# Altium PCB X-DO10 RFID_V1.0..PcbDoc (part 3 of 3)
Units mm, origin at the board's own origin, x right, y up, seen from the top; angles counter-clockwise.
Board outline 1582.55 x 1344.17 mm, 2 copper layers (Top Layer, Bottom Layer); 182 components, 148 nets, 511 pads, 172 vias.
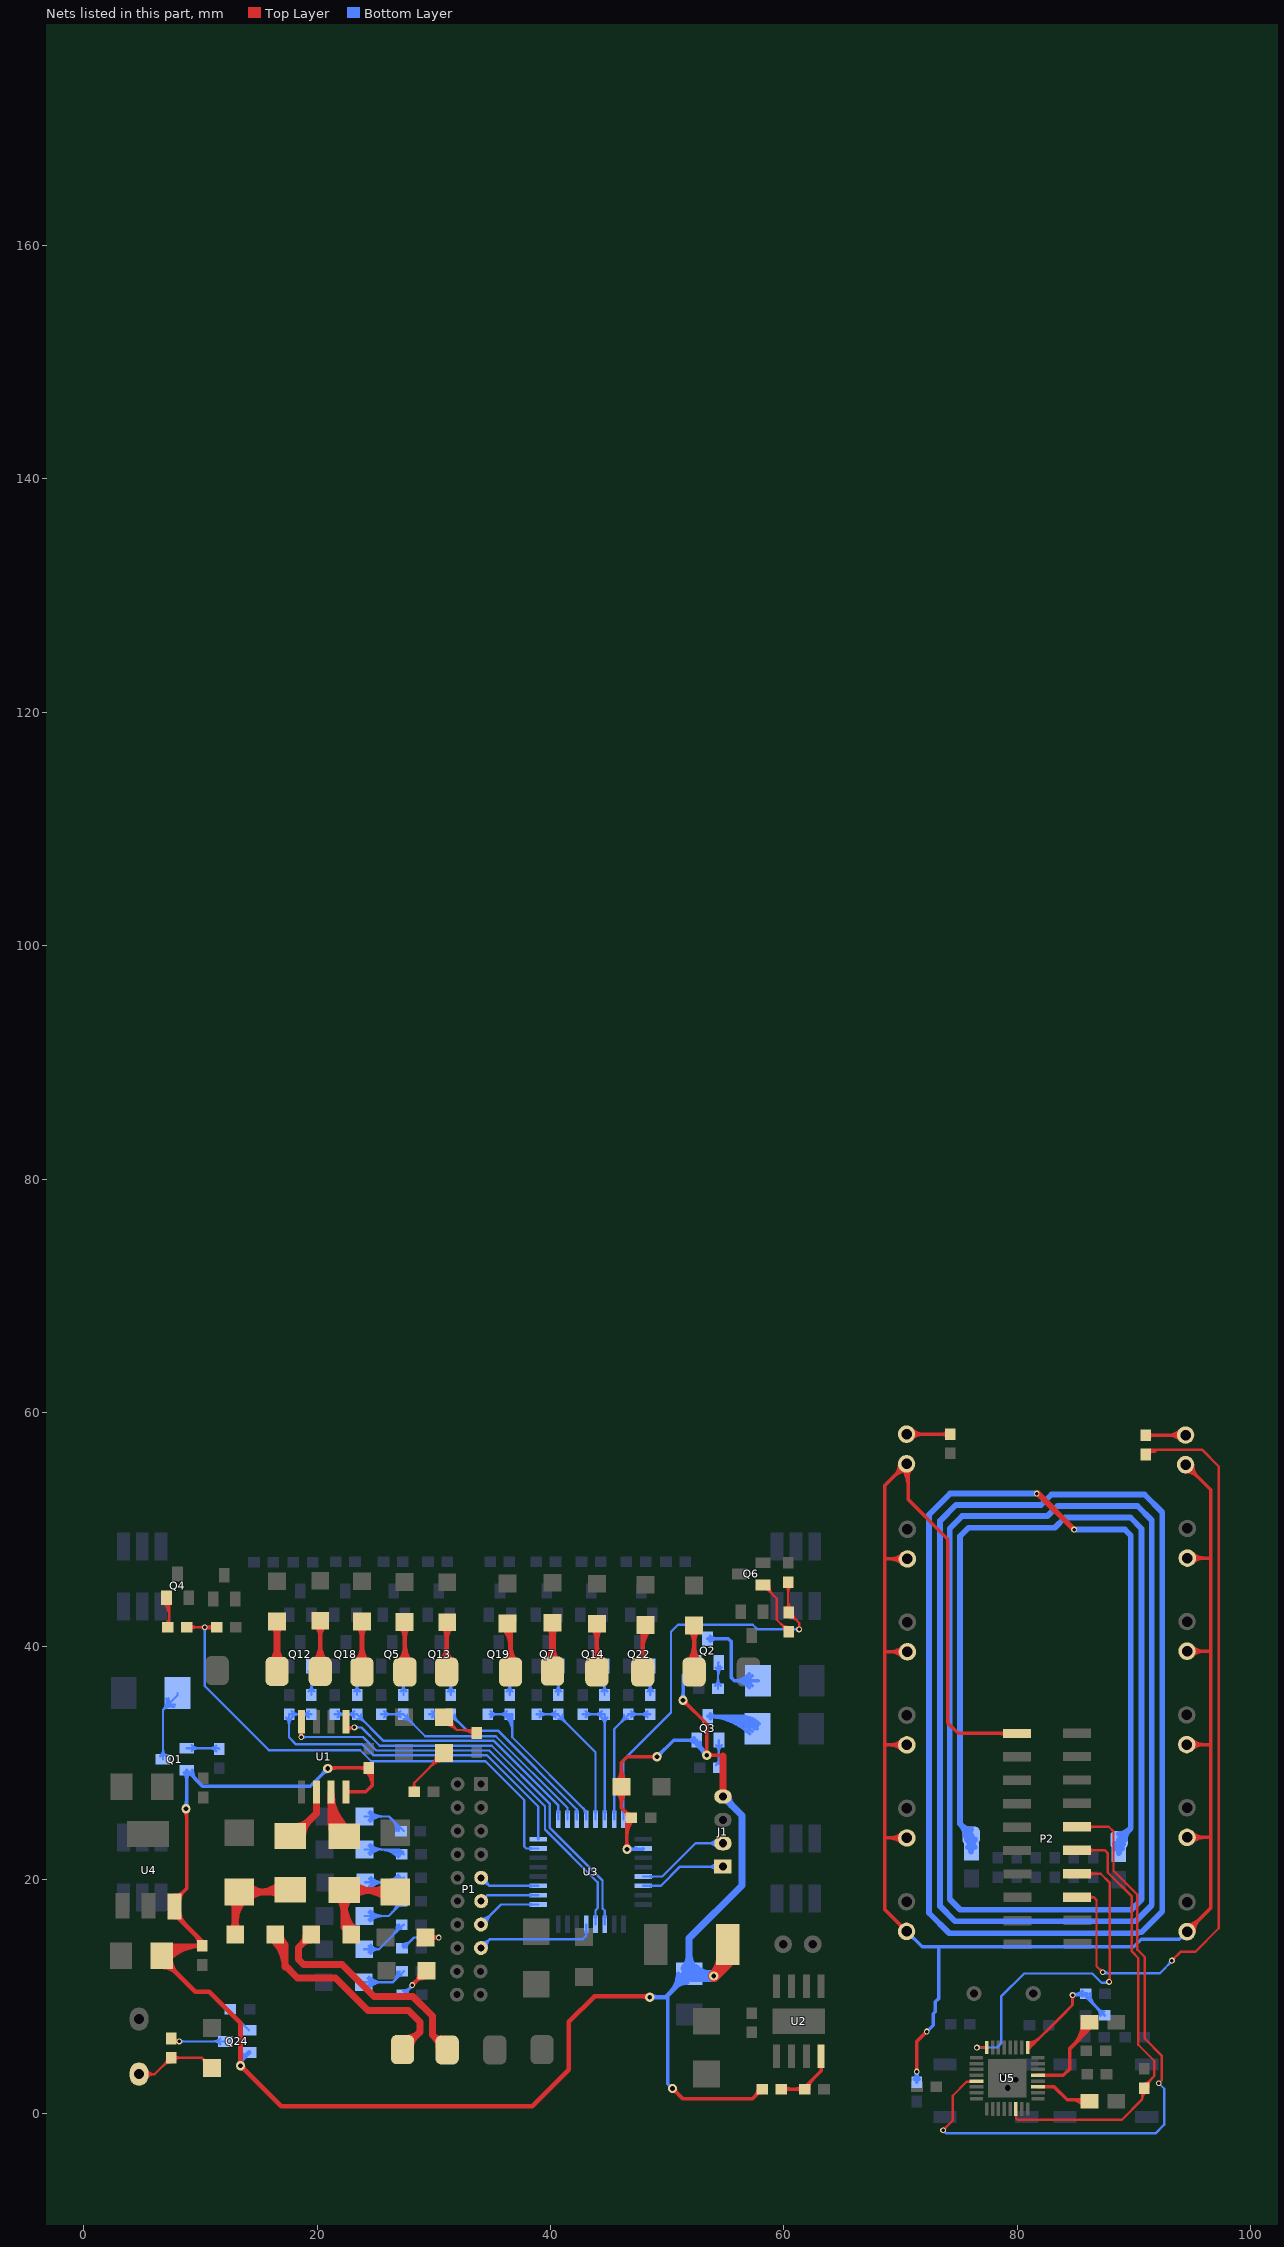
[diagram p3: the nets of this part, all layers, seen from the top]

## Via types
v1: diameter 0.5, hole 0.3, Top Layer to Bottom Layer, 158 vias
v2: diameter 0.8, hole 0.4, Top Layer to Bottom Layer, 14 vias

## Nets (pads, with @x,y where several pads share a name; then routed paths per layer and width w, separated by ;. In a path a pad name is that pad's centre, name@x,y a point inside that pad or via, vN(x,y) a via of type N, cw(c..) or ccw(c..) an arc to the next point about the centre after c; other vN are vias at no path point) (continued)
NetD7_1: D7.1 R12.1 | length 10.1
  Bottom Layer w0.2: D7.1@24.075,25.425 26.175,25.425 R12.1@27.425,24.175 ; D7.1@24.402,25.098 cw(c25.19,24.31) 25.19,25.425 cw(c25.19,26.54) D7.1@24.402,25.752 ; D7.1@24.543,24.957 cw(c25.673,23.827) 25.673,25.425 cw(c25.673,27.023) D7.1@24.543,25.893 ; 26.358,25.242 cw(c25.291,24.175) R12.1@26.8,24.175 ; 26.699,24.9 cw(c25.974,24.175) R12.1@27,24.175
NetD8_1: D8.1 R13.1 | length 12.7
  Bottom Layer w0.2: D8.1@24.075,22.6 26.996,22.6 R13.1@27.425,22.171 ; D8.1@24.402,22.273 cw(c25.19,21.485) 25.19,22.6 cw(c25.19,23.715) D8.1@24.402,22.927 ; D8.1@24.543,22.132 cw(c25.673,21.002) 25.673,22.6 cw(c25.673,24.198) D8.1@24.543,23.068 ; 25.329,22.6 cw(c25.329,20.304) R13.1@26.953,21.928 ; 25.812,22.6 cw(c25.812,20.787) R13.1@27.094,22.069 ; 26.295,22.6 cw(c26.295,21.27) R13.1@27.235,22.21 ; R13.1@26.778,22.6 cw(c26.778,21.753) R13.1@27.377,22.352
NetD9_1: D9.1 R14.1 | length 12.4
  Bottom Layer w0.2: D9.1@24.125,19.775 27.032,19.775 R14.1@27.425,20.168 ; D9.1@24.452,19.448 cw(c25.24,18.66) 25.24,19.775 cw(c25.24,20.89) D9.1@24.452,20.102 ; D9.1@24.593,19.307 cw(c25.723,18.177) 25.723,19.775 cw(c25.723,21.373) D9.1@24.593,20.243 ; 25.389,19.775 ccw(c25.389,21.986) R14.1@26.953,20.422 ; 25.872,19.775 ccw(c25.872,21.503) R14.1@27.094,20.281 ; 26.355,19.775 ccw(c26.355,21.02) R14.1@27.235,20.14 ; R14.1@26.838,19.775 ccw(c26.838,20.537) R14.1@27.377,19.998
NetD10_1: D10.1 R27.1 | length 10.6
  Top Layer w0.2: D10.1@29.3,15.05 v1(30.425,15.05) ; D10.1@29.704,14.826 cw(c30.085,14.614) 30.085,15.05 cw(c30.085,15.486) D10.1@29.704,15.274 ; D10.1@29.879,14.729 cw(c30.425,14.425) v1(30.425,15.05) ; D10.1@29.879,15.371 ccw(c30.425,15.675) v1(30.425,15.05) ; v1@30.289,14.986 ccw(c30.042,14.869) 30.113,15.134 ccw(c30.183,15.398) v1@30.339,15.173 ; v1@30.289,15.114 cw(c30.042,15.231) 30.113,14.966 cw(c30.183,14.702) v1@30.339,14.927 ; v1@30.319,14.944 ccw(c30.063,14.688) 30.063,15.05 ccw(c30.063,15.412) v1@30.319,15.156
  Bottom Layer w0.2: R27.1@27.325,14.3 ccw(c27.325,14.886) R27.1@27.74,14.472 ; R27.1@27.325,14.5 ccw(c27.325,15.569) 28.081,14.813 ; R27.1@27.425,14.157 28.318,15.05 v1(30.425,15.05) ; R27.1@27.675,14.15 cw(c28.296,14.15) 27.857,14.589 ; v1@30.319,14.944 ccw(c30.063,14.688) 30.063,15.05 ccw(c30.063,15.412) v1@30.319,15.156
NetD11_1: D11.1 R28.1 | length 10.1
  Bottom Layer w0.2: D11.1@24.075,16.9 26.136,16.9 R28.1@27.4,18.164 ; D11.1@24.402,16.573 cw(c25.19,15.785) 25.19,16.9 cw(c25.19,18.015) D11.1@24.402,17.227 ; D11.1@24.543,16.432 cw(c25.673,15.302) 25.673,16.9 cw(c25.673,18.498) D11.1@24.543,17.368 ; 26.454,17.218 ccw(c25.496,18.175) R28.1@26.85,18.175 ; 26.795,17.559 ccw(c26.179,18.175) R28.1@27.05,18.175 ; R28.1@26.962,17.727 cw(c27.2,17.489) R28.1@27.2,17.825
NetD12_1: D12.1 R29.1 | length 9.1
  Bottom Layer w0.2: D12.1@24.05,14.05 25.314,14.05 ; D12.1@24.43,13.787 cw(c24.932,13.439) 24.932,14.05 cw(c24.932,14.661) D12.1@24.43,14.313 ; D12.1@24.594,13.673 cw(c25.314,13.174) 25.314,14.05 ; D12.1@24.594,14.427 ccw(c25.314,14.926) 25.314,14.05 ; 26.451,15.187 ccw(c25.488,16.15) R29.1@26.85,16.15 ; 26.792,15.528 ccw(c26.171,16.15) R29.1@27.05,16.15 ; R29.1@26.968,15.704 cw(c27.2,15.472) R29.1@27.2,15.8 ; R29.1@27.425,16.161 25.314,14.05
NetD13_1: D13.1 R39.1 | length 10
  Bottom Layer w0.2: D13.1@24,11.225 26.496,11.225 ; D13.1@24.327,10.898 cw(c25.115,10.11) 25.115,11.225 cw(c25.115,12.34) D13.1@24.327,11.552 ; D13.1@24.468,10.757 cw(c25.598,9.627) 25.598,11.225 cw(c25.598,12.823) D13.1@24.468,11.693 ; 26.835,11.563 ccw(c26.254,12.143) R39.1@27.075,12.149 ; R39.1@26.875,12.148 cw(c25.583,12.139) 26.496,11.225 ; 26.963,11.691 cw(c27.225,11.429) R39.1@27.225,11.8 ; R39.1@27.425,12.154 26.496,11.225
NetD14_1: D14.1 R40.1 | length 11.1
  Top Layer w0.2: v1@28.112,11.12 ccw(c27.992,11.582) 28.404,11.341 ; v1(28.15,10.975) D14.1@29.375,12.2 ; v1@28.15,11.125 ccw(c28.15,11.487) 28.406,11.231 ccw(c28.662,10.975) v1@28.3,10.975 ; v1@28.188,11.12 ccw(c28.25,11.359) 28.375,11.146 ; v1@28.295,10.937 cw(c28.757,10.817) 28.516,11.229 ; v1@28.295,11.013 cw(c28.534,11.075) 28.321,11.2 ; D14.1@28.713,12.2 cw(c27.115,12.2) 28.245,11.07 cw(c29.375,9.94) D14.1@29.375,11.538 ; D14.1@28.913,12.2 cw(c27.798,12.2) 28.586,11.411 cw(c29.375,10.623) D14.1@29.375,11.738
  Bottom Layer w0.2: R40.1@27.375,10.5 ccw(c27.375,11.224) 27.887,10.712 ; R40.1@27.425,10.15 27.425,10.25 v1(28.15,10.975) ; R40.1@27.725,10.15 cw(c28.691,10.15) v1@28.008,10.833 ; 27.861,10.579 cw(c28.329,10.309) v1@28.189,10.83 ; v1@28,10.975 cw(c27.638,10.975) 27.894,10.719 cw(c28.15,10.463) v1@28.15,10.825
NetD15_1: D15.1 R41.1 | length 9.4
  Top Layer w0.2: D15.1@30.875,33.925 31.975,32.825 ; D15.1@30.884,33.463 cw(c30.904,32.419) 31.643,33.157 cw(c32.381,33.896) D15.1@31.337,33.916 ; D15.1@30.888,33.263 cw(c30.917,31.767) 31.975,32.825 ; D15.1@31.537,33.912 ccw(c33.033,33.883) 31.975,32.825 ; 32.372,32.825 cw(c32.372,31.297) R41.1@33.453,32.378 ; 32.855,32.825 cw(c32.855,31.78) R41.1@33.594,32.519 ; R41.1@33.7,32.825 31.975,32.825
NetD16_1: D16.1 R48.1 | length 9.7
  Top Layer w0.2: R48.1@28.1,27.818 ccw(c27.697,28.3) 28.325,28.3 ; R48.1@28.325,27.55 28.325,28.3 ; R48.1@28.55,27.818 cw(c28.953,28.3) 28.325,28.3 ; D16.1@30.213,30.85 cw(c28.615,30.85) 29.745,29.72 cw(c30.875,28.59) D16.1@30.875,30.188 ; D16.1@30.413,30.85 cw(c29.298,30.85) 30.086,30.061 cw(c30.875,29.273) D16.1@30.875,30.388 ; D16.1@30.875,30.85 28.325,28.3
NetD25_2: D25.2 R55.2 | length 7.1
  Top Layer w0.3: D25.2@70.5,58.17 R55.2@74.22,58.17 ; D25.2@70.924,57.746 cw(c71.949,56.721) 71.949,58.17 cw(c71.949,59.619) D25.2@70.924,58.594 ; 73.489,58.17 ccw(c73.489,58.911) R55.2@74.013,58.387 ; 73.513,58.17 cw(c73.513,57.463) R55.2@74.013,57.963
NetD28_2: D28.2 R58.2 | length 7.4
  Top Layer w0.3: R58.2@90.975,58.075 D28.2@94.38,58.075 ; R58.2@91.187,57.863 cw(c91.699,57.351) 91.699,58.075 cw(c91.699,58.799) R58.2@91.187,58.287 ; 92.903,58.075 ccw(c92.903,59.592) D28.2@93.976,58.519 ; 93,58.075 cw(c93,56.695) D28.2@93.976,57.671 ; 93.627,58.075 ccw(c93.627,58.868) D28.2@94.188,58.307
NetD29_2: D29.2 LS1.2 R56.1 | length 15.7
  Top Layer w0.2: LS1.2@4.75,3.35 6.1,3.35 ; LS1.2@5.159,3.062 cw(c5.714,2.67) 5.714,3.35 cw(c5.714,4.029) LS1.2@5.159,3.638 ; LS1.2@5.322,2.946 cw(c6.1,2.399) 6.1,3.35 ; LS1.2@5.322,3.753 ccw(c6.1,4.301) 6.1,3.35 ; 6.817,4.067 cw(c7.5,3.384) R56.1@7.5,4.35 ; 6.938,4.188 ccw(c6.426,4.7) R56.1@7.15,4.7 ; R56.1@7.747,4.503 cw(c8.345,3.905) 8.345,4.75 cw(c8.345,5.595) R56.1@7.747,4.997 ; D29.2@10.35,3.998 ccw(c9.53,4.159) 10.121,4.75 ; D29.2@10.547,3.96 ccw(c9.974,4.072) 10.387,4.484 ccw(c10.799,4.897) D29.2@10.911,4.324 ; D29.2@10.873,4.521 cw(c10.712,5.341) 10.121,4.75 ; D29.2@11,3.871 10.121,4.75 ; 6.1,3.35 R56.1@7.5,4.75 10.121,4.75
NetDO1_1: DO1.1 F3.2 | length 8.7
  Top Layer w0.6: DO1.1@16.08,38.595 ccw(c14.885,39.79) 16.575,39.79 ccw(c18.265,39.79) DO1.1@17.07,38.595 ; F3.2@16.248,41.809 cw(c15.46,41.02) 16.575,41.02 cw(c17.69,41.02) F3.2@16.902,41.809 ; DO1.1@16.575,37.85 F3.2@16.575,42.136
NetDO2_1: DO2.1 F4.2 | length 9.5
  Top Layer w0.4: DO2.1@19.709,38.666 ccw(c18.344,40.031) 20.275,40.031 ccw(c22.206,40.031) DO2.1@20.841,38.666 ; F4.2@19.878,41.788 cw(c18.918,40.829) 20.275,40.829 cw(c21.632,40.829) F4.2@20.672,41.788 ; DO2.1@20.275,37.85 F4.2@20.275,42.186
NetDO3_1: DO3.1 F5.2 | length 9.5
  Top Layer w0.4: DO3.1@23.284,38.616 ccw(c21.919,39.981) 23.85,39.981 ccw(c25.781,39.981) DO3.1@24.416,38.616 ; F5.2@23.453,41.738 cw(c22.493,40.779) 23.85,40.779 cw(c25.207,40.779) F5.2@24.247,41.738 ; DO3.1@23.85,37.8 F5.2@23.85,42.136
NetDO4_1: DO4.1 F6.2 | length 9.5
  Top Layer w0.4: DO4.1@26.959,38.616 ccw(c25.594,39.981) 27.525,39.981 ccw(c29.456,39.981) DO4.1@28.091,38.616 ; F6.2@27.103,41.688 cw(c26.083,40.668) 27.525,40.668 ; F6.2@27.5,42.086 27.525,42.061 DO4.1@27.525,37.8 ; 27.525,40.789 cw(c28.796,40.789) F6.2@27.897,41.688
NetDO5_1: DO5.1 F7.2 | length 9.5
  Top Layer w0.4: DO5.1@30.534,38.616 ccw(c29.169,39.981) 31.1,39.981 ccw(c33.031,39.981) DO5.1@31.666,38.616 ; F7.2@30.753,41.663 cw(c29.914,40.824) 31.1,40.824 ; DO5.1@31.1,37.8 31.1,41.81 F7.2@31.35,42.061 ; 31.1,40.583 cw(c32.628,40.583) F7.2@31.547,41.663
NetDO6_1: DO6.1 F8.2 | length 10.4
  Top Layer w0.4: F8.2@35.928,41.563 cw(c34.365,40) 36.575,40 ; DO6.1@36.009,38.616 ccw(c34.644,39.981) 36.575,39.981 ccw(c38.506,39.981) DO6.1@37.141,38.616 ; F8.2@36.21,41.846 cw(c35.33,40.966) 36.575,40.966 ; F8.2@36.325,41.961 36.575,41.711 DO6.1@36.575,37.8 ; F8.2@36.575,41.207 cw(c37.078,41.207) F8.2@36.722,41.563
NetDO7_1: DO7.1 F9.2 | length 8.5
  Top Layer w0.6: DO7.1@39.68,38.62 ccw(c38.485,39.815) 40.175,39.815 ccw(c41.865,39.815) DO7.1@40.67,38.62 ; F9.2@39.848,41.684 cw(c39.06,40.895) 40.175,40.895 cw(c41.29,40.895) F9.2@40.502,41.684 ; DO7.1@40.175,37.875 F9.2@40.175,42.011
NetDO8_1: DO8.1 F10.2 | length 9.3
  Top Layer w0.4: DO8.1@43.409,38.616 ccw(c42.044,39.981) 43.975,39.981 ccw(c45.906,39.981) DO8.1@44.541,38.616 ; F10.2@43.578,41.538 cw(c42.618,40.579) 43.975,40.579 cw(c45.332,40.579) F10.2@44.372,41.538 ; DO8.1@43.975,37.8 F10.2@43.975,41.936
NetDO9_1: DO9.1 F11.2 | length 10.1
  Top Layer w0.4: DO9.1@47.334,38.616 ccw(c45.969,39.981) 47.9,39.981 ccw(c49.831,39.981) DO9.1@48.466,38.616 ; F11.2@47.728,41.438 cw(c47.311,41.022) 47.9,41.022 ; DO9.1@47.9,37.8 F11.2@47.9,41.836 ; 47.9,39.936 cw(c50.025,39.936) F11.2@48.522,41.438 ; 47.9,40.901 cw(c49.059,40.901) F11.2@48.24,41.721
NetDO10_1: DO10.1 F12.2 | length 9.2
  Top Layer w0.4: DO10.1@51.734,38.616 ccw(c50.369,39.981) 52.3,39.981 ccw(c54.231,39.981) DO10.1@52.866,38.616 ; F12.2@51.903,41.388 cw(c50.943,40.429) 52.3,40.429 cw(c53.657,40.429) F12.2@52.697,41.388 ; DO10.1@52.3,37.8 F12.2@52.3,41.786
NetF1_1: F1.1 R6.1 T2.2 | length 19.3
  Top Layer w0.6: T2.2@12.627,18.349 cw(c11.761,17.483) 12.986,17.483 ; F1.1@12.659,15.627 ccw(c11.87,16.415) 12.986,16.415 ccw(c14.101,16.415) F1.1@13.312,15.627 ; T2.2@12.875,18.945 16.82,18.945 R6.1@17.025,19.15 ; F1.1@12.986,15.3 T2.2@12.986,18.085 ; 12.986,16.336 cw(c15.832,16.336) T2.2@13.819,18.349 ; 12.986,17.785 cw(c14.383,17.785) T2.2@13.395,18.773 ; T2.2@14.073,18.349 cw(c15.512,16.91) 15.512,18.945 cw(c15.512,20.98) T2.2@14.073,19.541 ; 15.049,18.945 ccw(c15.049,21.576) R6.1@16.909,19.716 ; 16.039,18.945 cw(c16.039,17.714) R6.1@16.909,18.584
NetF1_2: F1.2 M485A.1 | length 28.3
  Top Layer w0.6: F1.2@16.12,14.944 cw(c14.139,12.545) 17.25,12.545 ; F1.2@16.415,14.838 cw(c16.415,13.723) 17.203,14.511 cw(c17.992,15.3) F1.2@16.877,15.3 ; F1.2@16.415,15.3 17.25,14.464 17.25,12.675 18.325,11.6 21.575,11.6 24.375,8.8 27.825,8.8 28.825,7.8 28.825,6.95 ; F1.2@16.502,15.406 cw(c15.191,13.819) 17.25,13.819 ; M485A.1@27.325,5.45 28.825,6.95 ; M485A.1@27.368,6.399 ccw(c27.485,8.29) 28.825,6.95 ; M485A.1@28.025,5.7 cw(c29.111,5.7) 28.343,6.468
NetF2_1: F2.1 R5.1 T1.2 | length 21.6
  Top Layer w0.6: R5.1@21.759,18.559 cw(c20.394,17.194) 22.325,17.194 cw(c24.256,17.194) R5.1@22.891,18.559 ; 22.325,16.45 ccw(c24.09,16.45) F2.1@22.842,15.202 ; 22.325,17.899 ccw(c25.538,17.899) F2.1@23.266,15.627 ; F2.1@22.939,15.3 22.325,15.914 22.325,19.075 26.57,19.075 T1.2@26.7,18.945 ; R5.1@23.141,18.559 cw(c24.386,17.314) 24.386,19.075 ; R5.1@23.141,19.691 ccw(c24.627,21.177) 24.627,19.075 ; 24.224,19.075 cw(c24.224,16.596) T1.2@25.977,18.349 ; 24.852,19.075 ccw(c24.852,20.666) T1.2@25.977,19.541
NetF2_2: F2.2 M485B.1 | length 23.3
  Top Layer w0.6: F2.2@19.048,15.3 cw(c17.933,15.3) 18.722,14.511 cw(c19.51,13.723) F2.2@19.51,14.838 ; F2.2@19.51,15.3 18.4,14.189 18.4,13.175 18.825,12.75 22.125,12.75 24.875,10 28.2,10 29.875,8.325 29.875,6.7 M485B.1@31.15,5.425 ; 29.875,6.7 ccw(c30.757,7.581) M485B.1@31.009,6.361 ; 30.132,6.443 cw(c29.364,5.675) M485B.1@30.45,5.675
NetL2_1: L2.1 U5.11 | length 7.1
  Top Layer w0.3: U5.11@81.75,2.25 83.15,2.25 84.25,1.15 L2.1@85.907,1.15 ; 84.582,1.15 cw(c84.582,-0.448) L2.1@85.712,0.682 ; 85.186,1.15 ccw(c85.186,1.894) L2.1@85.712,1.368 ; 85.307,1.15 cw(c85.307,0.277) L2.1@85.924,0.894
NetL3_1: L3.1 U5.13 | length 12.7
  Top Layer w0.3: U5.13@81.75,3.25 83.925,3.25 84.5,3.825 84.5,5.55 86.182,7.232 L3.1@86.182,7.8 ; 84.736,5.786 ccw(c82.721,7.8) L3.1@85.57,7.8 ; 85.248,6.298 ccw(c83.745,7.8) L3.1@85.87,7.8 ; 85.76,6.81 ccw(c84.77,7.8) L3.1@86.17,7.8
NetQ1_1: Q1.1 R2.2 | length 5.5
  Bottom Layer w0.2: Q1.1@8.841,31.278 11.548,31.278 R2.2@11.625,31.2 ; Q1.1@9.271,31.025 cw(c9.881,30.415) 9.881,31.278 cw(c9.881,32.14) Q1.1@9.271,31.53 ; 10.714,31.278 cw(c10.714,30.339) R2.2@11.378,31.003 ; 10.846,31.278 ccw(c10.846,32.029) R2.2@11.378,31.497
NetQ1_3: Q1.3 R3.2 | length 11.3
  Bottom Layer w0.2: Q1.3@6.556,30.578 ccw(c5.946,31.187) 6.809,31.187 ccw(c7.671,31.187) Q1.3@7.061,30.578 ; Q1.3@6.809,30.325 6.809,34.559 ; R3.2@7.044,34.794 cw(c7.589,34.249) R3.2@7.815,34.985 ; R3.2@7.061,34.811 ccw(c6.497,35.375) R3.2@7.272,35.562 ; R3.2@7.078,35.515 cw(c6.09,35.277) 6.809,34.559 ; R3.2@7.756,34.794 ccw(c7.478,33.889) 6.809,34.559 ; R3.2@8.05,36 8.05,35.8 6.809,34.559
NetQ2_1: Q2.1 R4.2 | length 5.4
  Bottom Layer w0.2: R4.2@54.103,36.622 ccw(c53.505,37.22) 54.35,37.22 ccw(c55.195,37.22) R4.2@54.597,36.622 ; Q2.1@54.15,38.179 cw(c53.667,37.696) 54.35,37.696 ; R4.2@54.35,36.375 54.35,38.557 Q2.1@54.402,38.609 ; 54.35,37.442 cw(c55.392,37.442) Q2.1@54.655,38.179 ; 54.35,37.925 cw(c54.909,37.925) Q2.1@54.514,38.32
NetQ2_3: Q2.3 R9.2 | length 13.8
  Bottom Layer w0.3: Q2.3@53.45,40.641 55.234,40.641 55.5,40.375 55.5,37.3 55.75,37.05 ; Q2.3@53.667,40.424 cw(c54.192,39.9) 54.192,40.641 cw(c54.192,41.383) Q2.3@53.667,40.859 ; R9.2@57.044,36.443 ccw(c55.75,35.367) 55.75,37.05 ; R9.2@57.044,37.657 cw(c55.75,38.733) 55.75,37.05 ; R9.2@57.275,36.635 ccw(c56.39,35.898) 56.39,37.05 ccw(c56.39,38.202) R9.2@57.275,37.465 ; R9.2@57.775,37.05 55.75,37.05
NetQ3_1: Q3.1 R10.2 | length 4.7
  Bottom Layer w0.2: Q3.1@54.175,31.529 cw(c53.571,30.925) 54.425,30.925 ; R10.2@54.178,29.822 ccw(c53.58,30.42) 54.425,30.42 ccw(c55.27,30.42) R10.2@54.672,29.822 ; R10.2@54.425,29.925 54.425,31.957 Q3.1@54.428,31.959 ; 54.425,30.913 cw(c55.296,30.913) Q3.1@54.68,31.529
NetQ3_3: Q3.3 R11.2 | length 20.1
  Bottom Layer w0.3: Q3.3@53.692,33.774 cw(c54.217,33.25) 54.217,33.991 cw(c54.217,34.733) Q3.3@53.692,34.209 ; 54.197,33.991 cw(c54.197,29.664) R11.2@57.264,32.717 ; 54.919,33.991 cw(c54.919,30.382) R11.2@57.477,32.928 ; 55.641,33.991 cw(c55.641,31.101) R11.2@57.69,33.14 ; 56.362,33.991 cw(c56.362,31.819) R11.2@57.902,33.351 ; R11.2@57.052,32.505 ccw(c53.475,28.946) Q3.3@53.475,33.991 56.659,33.991 R11.2@57.725,32.925
NetQ4_1: Q4.1 R18.1 | length 7.4
  Top Layer w0.2: Q4.1@6.845,43.729 cw(c5.626,42.51) 7.35,42.51 ; Q4.1@6.986,43.87 cw(c6.108,42.992) 7.35,42.992 ; R18.1@7.003,41.872 ccw(c6.164,42.711) 7.35,42.711 ; Q4.1@7.097,44.159 7.35,43.907 R18.1@7.35,41.625 ; Q4.1@7.128,44.012 cw(c6.591,43.475) 7.35,43.475 ; R18.1@7.144,41.731 ccw(c6.646,42.229) 7.35,42.229 ccw(c7.854,42.229) R18.1@7.497,41.872
NetQ5_1: Q5.1 R20.2 | length 5.2
  Bottom Layer w0.2: Q5.1@27.15,37.879 cw(c26.546,37.275) 27.4,37.275 ; R20.2@27.153,36.122 ccw(c26.555,36.72) 27.4,36.72 ccw(c28.245,36.72) R20.2@27.647,36.122 ; R20.2@27.4,35.825 27.4,38.307 Q5.1@27.403,38.309 ; 27.4,37.263 cw(c28.271,37.263) Q5.1@27.655,37.879
NetQ6_1: Q6.1 R19.1 | length 8.2
  Top Layer w0.2: Q6.1@58.216,45.248 59.375,44.088 59.375,42.275 R19.1@60.4,41.25 ; Q6.1@58.393,44.89 cw(c58.393,44.457) 58.7,44.763 ; Q6.1@58.551,45.248 ccw(c59.359,45.248) 58.787,44.676 ; Q6.1@58.751,45.248 ccw(c60.042,45.248) 59.129,44.334 ; 59.717,41.933 ccw(c60.4,42.616) R19.1@60.4,41.65 ; 59.838,41.812 cw(c59.326,41.3) R19.1@60.05,41.3
NetQ7_1: Q7.1 R22.1 | length 5.6
  Bottom Layer w0.2: R22.1@40.428,36.122 ccw(c39.83,36.72) 40.675,36.72 ccw(c41.52,36.72) R22.1@40.922,36.122 ; Q7.1@40.475,37.879 cw(c39.992,37.396) 40.675,37.396 ; R22.1@40.675,35.825 40.675,38.257 Q7.1@40.727,38.309 ; 40.675,37.142 cw(c41.717,37.142) Q7.1@40.98,37.879 ; 40.675,37.625 cw(c41.234,37.625) Q7.1@40.839,38.02
NetQ12_1: Q12.1 R33.1 | length 5.2
  Bottom Layer w0.2: Q12.1@19.275,37.879 cw(c18.671,37.275) 19.525,37.275 ; R33.1@19.278,36.122 ccw(c18.68,36.72) 19.525,36.72 ccw(c20.37,36.72) R33.1@19.772,36.122 ; R33.1@19.525,35.825 19.525,38.307 Q12.1@19.528,38.309 ; 19.525,37.263 cw(c20.396,37.263) Q12.1@19.78,37.879
NetQ13_1: Q13.1 R34.1 | length 5.2
  Bottom Layer w0.2: R34.1@31.203,36.122 ccw(c30.605,36.72) 31.45,36.72 ccw(c32.295,36.72) R34.1@31.697,36.122 ; Q13.1@31.225,37.879 cw(c30.682,37.336) 31.45,37.336 ; R34.1@31.45,35.825 31.45,38.282 Q13.1@31.478,38.309 ; 31.45,37.203 cw(c32.406,37.203) Q13.1@31.73,37.879
NetQ14_1: Q14.1 R35.1 | length 5.2
  Bottom Layer w0.2: Q14.1@44.35,37.879 cw(c43.686,37.215) 44.625,37.215 ; R35.1@44.378,36.122 ccw(c43.78,36.72) 44.625,36.72 ccw(c45.47,36.72) R35.1@44.872,36.122 ; Q14.1@44.603,38.309 44.625,38.287 R35.1@44.625,35.825 ; 44.625,37.324 cw(c45.411,37.324) Q14.1@44.855,37.879
NetQ18_1: Q18.1 R44.1 | length 5.2
  Bottom Layer w0.2: Q18.1@23.175,37.879 cw(c22.571,37.275) 23.425,37.275 ; R44.1@23.178,36.122 ccw(c22.58,36.72) 23.425,36.72 ccw(c24.27,36.72) R44.1@23.672,36.122 ; R44.1@23.425,35.825 23.425,38.307 Q18.1@23.427,38.309 ; 23.425,37.263 cw(c24.296,37.263) Q18.1@23.68,37.879
NetQ19_1: Q19.1 R45.1 | length 5.2
  Bottom Layer w0.2: R45.1@36.253,36.122 ccw(c35.655,36.72) 36.5,36.72 ccw(c37.345,36.72) R45.1@36.747,36.122 ; Q19.1@36.275,37.879 cw(c35.732,37.336) 36.5,37.336 ; R45.1@36.5,35.825 Q19.1@36.5,38.307 ; 36.5,37.203 cw(c37.456,37.203) Q19.1@36.78,37.879 ; Q19.1@36.725,38.307 Q19.1@36.728,38.309
NetQ22_1: Q22.1 R47.1 | length 5.2
  Bottom Layer w0.2: Q22.1@48.3,37.879 cw(c47.696,37.275) 48.55,37.275 ; R47.1@48.303,36.122 ccw(c47.705,36.72) 48.55,36.72 ccw(c49.395,36.72) R47.1@48.797,36.122 ; R47.1@48.55,35.825 48.55,38.307 Q22.1@48.552,38.309 ; 48.55,37.263 cw(c49.421,37.263) Q22.1@48.805,37.879
NetQ24_1: Q24.1 R54.2 | length 2.5
  Bottom Layer w0.2: R54.2@12.375,8.893 Q24.1@14.166,7.103
NetQ24_3: Q24.3 R56.2 | length 8.1
  Top Layer w0.2: R56.2@7.5,6.4 7.75,6.15 v1(8.2,6.15) cw(c8.2,6.52) R56.2@7.84,6.433 ; R56.2@7.646,6.385 ccw(c7.945,6.458) R56.2@7.945,6.15 ; v1@8.094,6.044 ccw(c7.838,5.788) 7.838,6.15 ccw(c7.838,6.512) v1@8.094,6.256
  Bottom Layer w0.2: v1(8.2,6.15) Q24.3@12.134,6.15 ; v1@8.306,6.044 cw(c8.562,5.788) 8.562,6.15 cw(c8.562,6.512) v1@8.306,6.256 ; 11.115,6.147 ccw(c11.115,7.01) Q24.3@11.725,6.4 ; 11.115,6.153 cw(c11.115,5.29) Q24.3@11.725,5.9
NetR5_2: R5.2 U1.7 | length 12.6
  Top Layer w0.2: R5.2@22.275,23.625 R5.2@22.675,23.225
  Top Layer w0.6: 21.205,26.16 ccw(c24.31,26.16) R5.2@22.21,23.872 ; U1.7@21.205,27.525 ccw(c25.563,27.525) R5.2@22.616,24.314 ; U1.7@21.205,27.525 R5.2@21.205,24.795 ; R5.2@21.805,23.43 cw(c23.057,24.794) R5.2@21.205,24.794 ; R5.2@22.325,23.675 R5.2@21.205,24.795
NetR6_2: R6.2 U1.6 | length 8.6
  Top Layer w0.6: R6.2@17.025,23.75 18.025,23.75 19.935,25.66 U1.6@19.935,27.525 ; R6.2@17.975,24.55 ccw(c17.975,26.602) 19.426,25.151 ; R6.2@18.775,23.75 cw(c20.586,23.75) 19.305,25.03
NetR7_1: R7.1 R8.2 U2.4 | length 9.2
  Top Layer w0.3: R7.1@59.775,2.075 R8.2@61.775,2.075 61.775,2.225 63.185,3.635 U2.4@63.185,4.875 ; R7.1@60.037,1.863 cw(c60.549,1.351) 60.549,2.075 cw(c60.549,2.799) R7.1@60.037,2.287 ; R8.2@61.513,1.863 ccw(c61.001,1.351) 61.001,2.075 ccw(c61.001,2.799) R8.2@61.513,2.287 ; R8.2@62.125,2.075 cw(c63.332,2.075) 62.479,2.929 ; U2.4@63.079,4.069 cw(c62.823,3.813) 63.185,3.813 cw(c63.547,3.813) U2.4@63.291,4.069
NetR53_1: R53.1 R61.2 U5.17 | length 18
  Top Layer w0.254: U5.17@80.875,5.54 ccw(c80.875,5.818) 81.071,5.621 ; U5.17@80.875,5.625 81.075,5.625 83.7,8.25 84.725,9.275 v1(84.725,10.125) ; U5.17@80.875,5.794 ccw(c80.875,6.685) 81.505,6.055 ; U5.17@80.875,6.048 ccw(c80.875,7.552) 81.939,6.489 ; v1@84.638,10.038 cw(c84.428,9.828) 84.725,9.828 cw(c85.022,9.828) v1@84.812,10.038
  Bottom Layer w0.254: v1(84.725,10.125) R53.1@85.725,10.125 ; v1(84.725,10.125) ccw(c84.725,11.316) R53.1@85.571,10.477 ; v1@84.786,10.232 ccw(c84.935,10.489) 85.012,10.202 ccw(c85.089,9.915) v1@84.832,10.064 ; v1@84.812,10.038 cw(c85.022,9.828) 85.022,10.125 cw(c85.022,10.422) v1@84.812,10.212 ; 85.322,10.125 cw(c85.322,9.772) R53.1@85.572,10.022 ; 85.335,10.125 ccw(c85.335,10.711) R53.1@85.751,10.299 ; R53.1@85.85,10.25 85.85,10 R61.2@87.475,8.375 ; R53.1@85.969,10.25 ccw(c86.86,10.25) 86.23,9.62 ; R53.1@86.223,10.25 ccw(c87.727,10.25) 86.664,9.186 ; 86.838,9.012 cw(c86.202,8.375) R61.2@87.102,8.375 ; 86.959,8.891 ccw(c87.425,9.357) R61.2@87.425,8.698
NetR59_2: pad.1 pad.2 R59.2 R60.2 | length 396.3
  Top Layer w0.5: v1(81.65,53.075) 81.775,53.075 v1(84.85,50)
  Bottom Layer w0.5: 75.136,24.739 cw(c74.197,23.8) pad.1@75.525,23.8 ; 75.257,24.618 ccw(c76.025,25.386) pad.1@76.025,24.3 ; pad.1@75.671,23.446 cw(c74.818,22.593) 76.025,22.593 cw(c77.232,22.593) pad.1@76.379,23.446 ; R60.2@75.778,22.792 ccw(c75.181,23.389) pad.1@76.025,23.389 ; R60.2@76.025,22.418 pad.1@76.025,23.8 ; pad.1@76.025,23.51 ccw(c77.04,23.51) R60.2@76.322,22.792 ; pad.1@76.075,23.8 75.075,24.8 75.075,49.425 75.8,50.15 83.2,50.15 84.075,51.025 89.675,51.025 90.625,50.075 90.625,18.3 89.75,17.425 75.1,17.425 74.2,18.325 74.2,50.1 75.25,51.15 82.55,51.15 83.425,52.025 90.275,52.025 91.5,50.8 91.5,17.825 90.125,16.45 74.65,16.45 73.375,17.725 73.375,50.75 74.725,52.1 82.025,52.1 82.925,53 90.875,53 92.4,51.475 92.4,17.275 90.625,15.5 90.353,15.5 90.278,15.425 74.15,15.425 72.425,17.15 72.425,51.275 74.225,53.075 v1(81.65,53.075) ; v1(84.85,50) 89.2,50 89.7,49.5 89.7,24.425 pad.2@88.7,23.425 R59.2@88.7,22.318 ; pad.2@88.369,23.05 cw(c87.725,22.318) R59.2@88.7,22.318 ; pad.2@88.403,22.692 ccw(c87.685,23.41) pad.2@88.7,23.41 ; R59.2@88.675,22.293 R59.2@88.7,22.318 ; pad.2@88.7,23.289 ccw(c89.544,23.289) pad.2@88.947,22.692 ; pad.2@88.7,23.925 ccw(c88.7,25.132) 89.554,24.279 ccw(c90.407,23.425) pad.2@89.2,23.425 ; pad.2@89.031,23.05 ccw(c89.675,22.318) R59.2@88.7,22.318
O1: R15.1 R18.2 U3.31 | length 50.1
  Top Layer w0.2: R18.2@9,41.625 v1(10.375,41.625) R15.1@11.5,41.625 ; R18.2@9.147,41.378 cw(c9.745,40.78) 9.745,41.625 cw(c9.745,42.47) R18.2@9.147,41.872 ; v1@10.269,41.519 ccw(c10.013,41.263) 10.013,41.625 ccw(c10.013,41.987) v1@10.269,41.731 ; v1@10.45,41.495 cw(c10.689,41.082) 10.812,41.543 ; v1@10.45,41.755 ccw(c10.689,42.168) 10.812,41.707 ; v1@10.481,41.519 cw(c10.737,41.263) 10.737,41.625 cw(c10.737,41.987) v1@10.481,41.731 ; v1@10.505,41.55 cw(c10.719,41.426) 10.655,41.665 ; v1@10.505,41.7 ccw(c10.719,41.824) 10.655,41.585 ; R15.1@11.103,41.378 ccw(c10.505,40.78) 10.505,41.625 ccw(c10.505,42.47) R15.1@11.103,41.872
  Bottom Layer w0.2: v1@10.269,41.519 cw(c10.013,41.263) 10.375,41.263 cw(c10.737,41.263) v1@10.481,41.519 ; v1(10.375,41.625) 10.375,36.6 15.875,31.1 23.7,31.1 24.65,30.15 34.425,30.15 37.75,26.825 37.75,22.85 37.925,22.675 U3.31@38.95,22.675 ; U3.31@38.329,22.604 ccw(c38.159,22.434) 38.159,22.675 ccw(c38.159,22.916) U3.31@38.329,22.746
O2: R30.1 R33.2 U3.32 | length 34.9
  Bottom Layer w0.2: R30.1@17.353,33.878 cw(c16.755,33.28) 17.6,33.28 cw(c18.445,33.28) R30.1@17.847,33.878 ; R30.1@17.847,33.928 cw(c18.445,33.33) 18.445,34.175 cw(c18.445,35.02) R30.1@17.847,34.422 ; R33.2@19.278,33.928 ccw(c18.68,33.33) 18.68,34.175 ccw(c18.68,35.02) R33.2@19.278,34.422 ; R33.2@19.525,34.175 R30.1@17.6,34.175 17.6,32.2 18.2,31.6 23.9,31.6 24.825,30.675 34.55,30.675 38.95,26.275 U3.32@38.95,23.475 ; U3.32@38.879,23.546 ccw(c38.709,23.716) 38.95,23.716 ccw(c39.191,23.716) U3.32@39.021,23.546
O3: R42.1 R44.2 U3.1 | length 27.9
  Bottom Layer w0.2: R42.1@21.525,34.175 R44.2@23.425,34.175 25.7,31.9 35.15,31.9 40.65,26.4 U3.1@40.65,25.175 ; R42.1@21.772,33.928 cw(c22.37,33.33) 22.37,34.175 cw(c22.37,35.02) R42.1@21.772,34.422 ; R44.2@23.178,33.928 ccw(c22.58,33.33) 22.58,34.175 ccw(c22.58,35.02) R44.2@23.178,34.422 ; R44.2@23.425,33.775 cw(c23.425,32.809) 24.108,33.492 ; R44.2@23.775,34.125 ccw(c24.499,34.125) 23.987,33.613 ; U3.1@40.579,25.796 ccw(c40.409,25.966) 40.65,25.966 ccw(c40.891,25.966) U3.1@40.721,25.796
O4: R16.1 R20.1 U3.2 | length 24.6
  Bottom Layer w0.2: R16.1@25.5,34.175 R20.1@27.4,34.175 29.275,32.3 35.316,32.3 41.45,26.166 U3.2@41.45,25.175 ; R16.1@25.747,33.928 cw(c26.345,33.33) 26.345,34.175 cw(c26.345,35.02) R16.1@25.747,34.422 ; R20.1@27.153,33.928 ccw(c26.555,33.33) 26.555,34.175 ccw(c26.555,35.02) R20.1@27.153,34.422 ; R20.1@27.4,33.775 cw(c27.4,32.809) 28.083,33.492 ; R20.1@27.75,34.125 ccw(c28.474,34.125) 27.962,33.613 ; U3.2@41.379,25.796 ccw(c41.209,25.966) 41.45,25.966 ccw(c41.691,25.966) U3.2@41.521,25.796
O5: R31.1 R34.2 U3.3 | length 21.2
  Bottom Layer w0.2: R31.1@29.6,34.175 R34.2@31.45,34.175 32.85,32.775 35.505,32.775 42.25,26.03 U3.3@42.25,25.175 ; R31.1@29.847,33.928 cw(c30.445,33.33) 30.445,34.175 cw(c30.445,35.02) R31.1@29.847,34.422 ; R34.2@31.203,33.928 ccw(c30.605,33.33) 30.605,34.175 ccw(c30.605,35.02) R34.2@31.203,34.422 ; R34.2@31.45,33.775 cw(c31.45,32.809) 32.133,33.492 ; R34.2@31.8,34.125 ccw(c32.524,34.125) 32.012,33.613 ; U3.3@42.179,25.796 ccw(c42.009,25.966) 42.25,25.966 ccw(c42.491,25.966) U3.3@42.321,25.796
O6: R43.1 R45.2 U3.4 | length 19.3
  Bottom Layer w0.2: R43.1@34.8,34.175 36.725,34.175 36.725,32.2 43.05,25.875 U3.4@43.05,25.175 ; R43.1@34.872,33.928 cw(c35.47,33.33) 35.47,34.175 cw(c35.47,35.02) R43.1@34.872,34.422 ; R45.2@36.253,33.878 cw(c35.112,32.737) 36.725,32.737 ; R45.2@36.253,33.928 ccw(c35.655,33.33) 35.655,34.175 ccw(c35.655,35.02) R45.2@36.253,34.422 ; R45.2@36.394,34.019 cw(c35.595,33.22) 36.725,33.22 ; R45.2@36.535,34.16 cw(c36.078,33.703) R45.2@36.725,33.703 ; 42.773,26.152 cw(c42.346,25.725) U3.4@42.95,25.725
O7: R21.1 R22.2 U3.5 | length 16.5
  Bottom Layer w0.2: R21.1@38.825,34.175 R22.2@40.675,34.175 40.675,34.1 43.85,30.925 U3.5@43.85,25.175 ; R21.1@39.072,33.928 cw(c39.67,33.33) 39.67,34.175 cw(c39.67,35.02) R21.1@39.072,34.422 ; R22.2@40.428,33.928 ccw(c39.83,33.33) 39.83,34.175 ccw(c39.83,35.02) R22.2@40.428,34.422 ; R22.2@40.675,33.775 cw(c40.675,32.99) 41.23,33.545 ; R22.2@41.025,34.125 ccw(c41.93,34.125) 41.29,33.485 ; U3.5@43.779,25.796 ccw(c43.609,25.966) 43.85,25.966 ccw(c44.091,25.966) U3.5@43.921,25.796
O8: R32.1 R35.2 U3.6 | length 15.2
  Bottom Layer w0.2: R32.1@42.775,34.175 R35.2@44.625,34.175 ; R32.1@43.022,33.928 cw(c43.62,33.33) 43.62,34.175 cw(c43.62,35.02) R32.1@43.022,34.422 ; R35.2@44.378,33.878 cw(c43.72,33.22) 44.65,33.22 ; R35.2@44.378,33.928 ccw(c43.78,33.33) 43.78,34.175 ccw(c43.78,35.02) R35.2@44.378,34.422 ; U3.6@44.579,25.796 ccw(c44.409,25.966) 44.65,25.966 ccw(c44.891,25.966) U3.6@44.721,25.796 ; U3.6@44.65,25.175 R35.2@44.65,34.15 ; 44.65,33.34 cw(c45.41,33.34) R35.2@44.872,33.878
O9: R46.1 R47.2 U3.7 | length 15.8
  Bottom Layer w0.2: U3.7@45.379,25.796 ccw(c45.209,25.966) 45.45,25.966 ccw(c45.691,25.966) U3.7@45.521,25.796 ; U3.7@45.45,25.175 45.45,32.9 46.65,34.1 R46.1@46.65,34.175 R47.2@48.55,34.175 ; 46.035,33.485 ccw(c45.395,34.125) R46.1@46.3,34.125 ; 46.095,33.545 cw(c46.65,32.99) R46.1@46.65,33.775 ; R46.1@46.897,33.928 cw(c47.495,33.33) 47.495,34.175 cw(c47.495,35.02) R46.1@46.897,34.422 ; R47.2@48.303,33.928 ccw(c47.705,33.33) 47.705,34.175 ccw(c47.705,35.02) R47.2@48.303,34.422
O10: R17.1 R19.2 U3.8 | length 39.1
  Top Layer w0.2: R17.1@60.128,45.203 cw(c59.53,44.605) 60.375,44.605 cw(c61.22,44.605) R17.1@60.622,45.203 ; R19.2@60.153,43.197 ccw(c59.615,43.735) 60.375,43.735 ; 60.375,43.855 ccw(c61.305,43.855) R19.2@60.647,43.197 ; R17.1@60.375,45.5 60.375,42.925 R19.2@60.4,42.9 61.3,42 v1(61.3,41.45) ; R19.2@60.4,42.5 cw(c60.4,41.534) 61.083,42.217 ; R19.2@60.75,42.85 ccw(c61.474,42.85) 60.962,42.338 ; v1@61.194,41.556 ccw(c60.938,41.812) 61.3,41.812 ccw(c61.662,41.812) v1@61.406,41.556
  Bottom Layer w0.2: U3.8@46.179,25.796 ccw(c46.009,25.966) 46.25,25.966 ccw(c46.491,25.966) U3.8@46.321,25.796 ; U3.8@46.25,25.175 46.25,30.25 50.325,34.325 50.325,41.25 50.925,41.85 57.325,41.85 57.725,41.45 v1(61.3,41.45) ; v1@61.194,41.344 ccw(c60.938,41.088) 60.938,41.45 ccw(c60.938,41.812) v1@61.194,41.556
RST: P1.6 U3.26 | length 5.5
  Bottom Layer w0.2: P1.6@34.063,18.165 34.573,18.675 U3.26@38.95,18.675 ; U3.26@38.329,18.604 ccw(c38.159,18.434) 38.159,18.675 ccw(c38.159,18.916) U3.26@38.329,18.746
RST_R: P2.16 R52.1 U5.6 | length 42.8
  Top Layer w0.2: U5.6@79.875,0.375 79.875,-0.425 80.019,-0.569 88.931,-0.569 90.675,1.175 90.675,2.15 91.725,3.2 91.725,4.5 90.35,5.875 90.35,13.3 89.8,13.85 89.8,18.575 87.725,20.65 87.725,22.3 87.497,22.528 P2.16@85.087,22.528 ; P2.16@86.099,22.315 cw(c86.612,21.803) 86.612,22.528 cw(c86.612,23.252) P2.16@86.099,22.74 ; R52.1@90.603,1.853 cw(c90.428,1.678) R52.1@90.675,1.678 ; 90.675,1.159 cw(c91.431,1.159) R52.1@91.034,1.802 ; 90.675,1.517 cw(c91.21,1.517) R52.1@90.929,1.972 ; R52.1@90.85,2.55 ccw(c90.85,3.093) 91.234,2.709 ; R52.1@91,2.2 cw(c91.664,2.2) 91.194,2.669 ; R52.1@91.2,2.2 cw(c92.347,2.2) 91.536,3.011
RT: P1.8 U3.21 | length 13.3
  Bottom Layer w0.2: P1.8@34.037,14.152 34.785,14.9 ; P1.8@34.067,14.45 ccw(c34.117,14.97) 34.486,14.601 ccw(c34.855,14.232) P1.8@34.336,14.181 ; P1.8@34.086,14.65 ccw(c34.171,15.515) 34.785,14.9 ; P1.8@34.535,14.201 cw(c35.4,14.285) 34.785,14.9 ; U3.21@42.979,15.554 cw(c42.809,15.384) 43.05,15.384 cw(c43.291,15.384) U3.21@43.121,15.554 ; U3.21@43.05,16.175 43.05,15.2 42.75,14.9 34.785,14.9
RT_R: P2.18 R58.1 | length 71.2
  Top Layer w0.2: P2.18@85.113,18.514 86.536,18.514 ; P2.18@86.147,18.327 cw(c86.536,18.018) 86.536,18.514 ; P2.18@86.147,18.701 ccw(c86.536,19.011) 86.536,18.514 ; v1@87.15,12.075 ccw(c86.788,12.075) 87.044,12.331 ccw(c87.3,12.587) v1@87.3,12.225 ; v1(87.3,12.075) 86.775,12.6 86.775,18.275 86.536,18.514 ; R58.1@90.93,56.353 cw(c91.95,55.333) 91.95,56.775 ; R58.1@91.081,56.369 cw(c91.76,55.69) 91.76,56.65 ; R58.1@91.2,56.65 91.4,56.85 95.8,56.85 97.25,55.4 97.25,15.85 95.225,13.825 93.975,13.825 v1(93.225,13.075) ; R58.1@91.222,56.722 ccw(c91.397,56.897) R58.1@91.397,56.65 ; v1@93.225,13.225 ccw(c93.225,13.587) 93.481,13.331 ccw(c93.737,13.075) v1@93.375,13.075
  Bottom Layer w0.2: v1(87.3,12.075) 87.375,12 92.203,12 93.225,13.022 v1(93.225,13.075) ; v1@87.406,12.181 ccw(c87.843,12.618) 87.843,12 ; 92.932,12.729 ccw(c92.585,13.075) v1@93.075,13.075 ; 93.059,12.856 cw(c93.225,12.69) v1@93.225,12.925
RXD: J1.2 U3.13 | length 11.4
  Bottom Layer w0.2: U3.13@47.95,20.275 49.575,20.275 52.425,23.125 J1.2@54.775,23.125 ; U3.13@48.571,20.204 cw(c48.741,20.034) 48.741,20.275 cw(c48.741,20.516) U3.13@48.571,20.346 ; J1.2@54.271,22.771 ccw(c53.418,21.918) 53.418,23.125 ccw(c53.418,24.332) J1.2@54.271,23.479 ; J1.2@54.413,22.913 ccw(c53.901,22.401) 53.901,23.125 ccw(c53.901,23.849) J1.2@54.413,23.337
RXD1: U1.1 U3.19 | length 36.1
  Top Layer w0.2: U1.1@22.475,32.825 cw(c22.859,32.61) 22.859,33.05 ; U1.1@22.475,33.525 22.475,33.05 v1(23.2,33.05) ccw(c23.2,32.419) U1.1@22.65,32.727 ; v1@23.065,33.115 cw(c22.812,33.236) 22.885,32.965 cw(c22.957,32.695) v1@23.115,32.926 ; v1@23.094,32.944 ccw(c22.838,32.688) 22.838,33.05 ccw(c22.838,33.412) v1@23.094,33.156
  Bottom Layer w0.2: v1(23.2,33.05) 23.8,33.05 25.375,31.475 34.975,31.475 39.925,26.525 39.925,24.466 44.45,19.941 44.45,17.55 44.65,17.35 U3.19@44.65,16.175 ; v1@23.306,32.944 cw(c23.562,32.688) 23.562,33.05 cw(c23.562,33.412) v1@23.306,33.156 ; U3.19@44.579,16.796 ccw(c44.409,16.966) 44.65,16.966 ccw(c44.891,16.966) U3.19@44.721,16.796
SCK: P1.5 U3.27 | length 6.9
  Bottom Layer w0.2: P1.5@34.063,20.172 34.759,19.475 ; P1.5@34.139,19.678 cw(c34.25,18.965) 34.759,19.475 ; P1.5@34.557,20.095 ccw(c35.269,19.985) 34.759,19.475 ; U3.27@38.329,19.404 ccw(c38.159,19.234) 38.159,19.475 ccw(c38.159,19.716) U3.27@38.329,19.546 ; U3.27@38.95,19.475 34.759,19.475
SCK_R: P2.15 U5.29 | length 58.2
  Top Layer w0.2: v1(73.625,-1.45) 74.45,-0.625 74.45,1.506 75.644,2.7 76.45,2.7 U5.29@76.5,2.75 ; v1@73.625,-1.3 ccw(c73.625,-0.938) 73.881,-1.194 ccw(c74.137,-1.45) v1@73.775,-1.45 ; 75.809,2.7 ccw(c75.809,2.991) U5.29@76.015,2.785 ; P2.15@85.087,24.534 87.816,24.534 88.225,24.125 88.225,20.775 90.275,18.725 90.275,14 90.9,13.375 90.9,6.4 92.35,4.95 92.35,2.825 v1(92.1,2.575) ; P2.15@86.099,24.322 cw(c86.612,23.81) 86.612,24.534 cw(c86.612,25.258) P2.15@86.099,24.746
  Bottom Layer w0.2: v1@73.625,-1.6 cw(c73.625,-1.962) 73.881,-1.706 cw(c74.137,-1.45) v1@73.775,-1.45 ; v1(73.625,-1.45) 73.9,-1.725 91.825,-1.725 92.575,-0.975 92.575,2.1 v1(92.1,2.575)
SDA: P1.7 U3.25 | length 9
  Bottom Layer w0.2: P1.7@34.037,16.159 35.754,17.875 U3.25@38.95,17.875 ; P1.7@34.037,16.459 ccw(c34.037,17.183) 34.549,16.671 ccw(c35.062,16.159) P1.7@34.337,16.159 ; P1.7@34.037,16.659 ccw(c34.037,17.866) 34.891,17.012 ccw(c35.744,16.159) P1.7@34.537,16.159 ; U3.25@38.329,17.804 ccw(c38.159,17.634) 38.159,17.875 ccw(c38.159,18.116) U3.25@38.329,17.946
SDA_R: P2.17 U5.24 | length 32.4
  Top Layer w0.2: v1(76.525,5.625) U5.24@77.375,5.625 ; v1@76.631,5.519 cw(c76.887,5.263) 76.887,5.625 cw(c76.887,5.987) v1@76.631,5.731 ; P2.17@85.113,20.521 87.129,20.521 87.85,19.8 ; P2.17@86.125,20.309 cw(c86.637,19.797) 86.637,20.521 cw(c86.637,21.245) P2.17@86.125,20.733 ; v1@87.744,11.356 ccw(c87.367,11.733) 87.9,11.733 ; v1@87.85,11.225 87.9,11.175 87.9,19.75
  Bottom Layer w0.2: v1(76.525,5.625) 78.25,5.625 78.6,5.975 78.6,10 80.575,11.975 86.4,11.975 87.2,11.175 v1@87.9,11.175 ; v1@76.631,5.519 cw(c76.887,5.263) 76.887,5.625 cw(c76.887,5.987) v1@76.631,5.731 ; 87.307,11.175 ccw(c87.307,11.793) v1@87.744,11.356
  other v1: 87.85,11.25
TXD: J1.1 U3.14 | length 10.9
  Bottom Layer w0.2: U3.14@47.95,19.475 49.45,19.475 51.1,21.125 J1.1@54.775,21.125 ; U3.14@48.571,19.404 cw(c48.741,19.234) 48.741,19.475 cw(c48.741,19.716) U3.14@48.571,19.546 ; J1.1@54.271,20.771 ccw(c53.418,19.918) 53.418,21.125 ccw(c53.418,22.332) J1.1@54.271,21.479 ; J1.1@54.413,20.913 ccw(c53.901,20.401) 53.901,21.125 ccw(c53.901,21.849) J1.1@54.413,21.337
TXD1: U1.4 U3.20 | length 40.3
  Top Layer w0.2: U1.4@18.524,32.684 cw(c18.218,32.378) v1@18.65,32.378 ; v1@18.544,32.331 ccw(c18.288,32.587) 18.65,32.587 ccw(c19.012,32.587) v1@18.756,32.331 ; v1@18.552,32.338 ccw(c18.43,32.479) U1.4@18.61,32.528 ; v1@18.575,32.355 ccw(c18.43,32.607) U1.4@18.71,32.531 ; U1.4@18.6,33.46 U1.4@18.665,33.525 ; 18.619,32.493 ccw(c18.838,32.551) v1@18.725,32.355 ; v1(18.65,32.225) U1.4@18.65,33.835 ; v1@18.65,32.306 cw(c19.184,32.306) U1.4@18.806,32.684 ; U1.4@18.712,32.538 ccw(c18.936,32.478) v1@18.762,32.324
  Bottom Layer w0.2: v1@18.6,32.225 23.925,32.225 25.075,31.075 34.75,31.075 39.525,26.3 39.525,24.3 44.05,19.775 44.05,17.575 43.85,17.375 U3.20@43.85,16.175 ; v1@18.756,32.119 cw(c19.012,31.863) 19.012,32.225 cw(c19.012,32.587) v1@18.756,32.331 ; U3.20@43.779,16.796 ccw(c43.609,16.966) 43.85,16.966 ccw(c44.091,16.966) U3.20@43.921,16.796
VDD_+5V: C1.2 C2.1 C3.2 C5.1 C6.1 C7.1 J1.4 L1.2 Q1.2 Q2.2 Q3.2 Q24.2 R7.2 U1.8 U3.10 U4.3 | length 239.5
  Top Layer w0.3: U4.3@7.811,17.716 7.811,18.236 8.825,19.25 v2@8.825,26.075 ; U4.3@7.811,18.666 ccw(c7.811,19.705) 8.546,18.971 ; U4.3@8.261,18.216 cw(c9.395,18.216) 8.593,19.018 ; v2@8.598,25.898 cw(c8.051,25.351) 8.825,25.351 ; 8.825,25.592 cw(c9.258,25.592) v2@8.952,25.898 ; v2(20.926,29.526) 20.975,29.575 24.725,29.575 24.725,28.075 24.175,27.525 U1.8@22.475,27.525 ; v2@21.103,29.35 cw(c21.647,28.806) 21.647,29.575 ; v2@21.103,29.703 ccw(c21.412,30.013) 21.412,29.575 ; U1.8@22.581,27.419 cw(c22.837,27.163) 22.837,27.525 cw(c22.837,27.887) U1.8@22.581,27.631 ; C3.2@24.213,29.313 cw(c22.976,28.076) 24.725,28.076 ; C3.2@24.213,29.363 ccw(c23.701,28.851) 23.701,29.575 ccw(c23.701,30.299) C3.2@24.213,29.787 ; C3.2@24.425,29.525 cw(c23.701,28.801) 24.725,28.801 ; C2.1@45.642,27.542 cw(c44.598,26.498) 46.075,26.498 cw(c47.553,26.498) C2.1@46.508,27.542 ; C2.1@45.642,28.408 ccw(c44.598,29.453) 46.075,29.453 ccw(c47.553,29.453) C2.1@46.508,28.408 ; 46.328,25.922 cw(c45.73,25.325) C1.2@46.575,25.325 ; v2@46.373,22.802 ccw(c45.946,23.229) 46.55,23.229 ccw(c47.154,23.229) v2@46.727,22.802 ; 46.448,25.802 ccw(c46.875,26.229) C1.2@46.875,25.625 ; v2(46.55,22.625) 46.55,24.95 C1.2@46.925,25.325 46.075,26.175 C2.1@46.075,27.975 46.075,30.025 46.575,30.525 v2(49.125,30.525) ; 46.55,23.816 cw(c48.384,23.816) C1.2@47.087,25.113 ; 46.55,24.54 cw(c47.66,24.54) C1.2@46.875,25.325 ; v2@48.948,30.348 ccw(c48.521,29.921) 48.521,30.525 ccw(c48.521,31.129) v2@48.948,30.702 ; v2@50.45,1.875 cw(c50.45,1.271) 50.877,1.698 cw(c51.304,2.125) v2@50.7,2.125 ; v2(50.45,2.125) 51.35,1.225 57.275,1.225 R7.2@58.125,2.075 ; v2@51.35,35.125 cw(c51.35,34.521) 51.777,34.948 cw(c52.204,35.375) v2@51.6,35.375 ; v2(51.35,35.375) 53.375,33.35 v2(53.375,30.675) 54.7,30.675 54.775,30.6 ; v2@53.198,30.852 ccw(c52.771,31.279) 53.375,31.279 ccw(c53.979,31.279) 53.552,30.852 ccw(c53.979,31.279) 53.979,30.675 ccw(c53.979,30.071) v2@53.552,30.498 ; 57.528,1.478 ccw(c56.93,2.075) R7.2@57.775,2.075 ; 57.648,1.598 cw(c58.075,1.171) R7.2@58.075,1.775
  Top Layer w0.4: C6.1@6.664,13.705 cw(c8.221,12.148) 8.221,14.35 ; C6.1@6.698,12.538 cw(c6.698,10.754) 7.96,12.015 ; C6.1@6.947,13.422 cw(c9.187,11.182) 9.187,14.35 ; C6.1@7.23,13.139 cw(c10.153,10.217) C7.1@10.153,14.35 ; C6.1@7.451,13.291 ccw(c9.3,13.291) 7.992,11.983 ; U4.3@7.811,16.816 cw(c7.811,16.217) U4.3@8.234,16.641 ; U4.3@7.811,17.716 7.811,17.064 10.175,14.7 C7.1@10.175,14.35 7.567,14.35 C6.1@6.698,13.481 6.698,13.277 9.575,10.4 10.75,10.4 13.45,7.7 v2(13.45,4.075) 16.925,0.6 38.45,0.6 41.575,3.725 41.575,7.825 43.775,10.025 48.425,10.025 v2(48.5,9.95) ; U4.3@8.211,17.216 ccw(c9.543,17.216) 8.601,16.274 ; 9.536,15.339 cw(c8.597,14.4) C7.1@9.925,14.4 ; C7.1@9.998,14.173 ccw(c9.571,13.746) 9.571,14.35 ccw(c9.571,14.954) C7.1@9.998,14.527 ; v2@13.309,4.216 ccw(c12.967,4.558) 13.45,4.558 ccw(c13.933,4.558) v2@13.591,4.216 ; v2@13.45,3.875 cw(c13.45,3.392) 13.791,3.734 cw(c14.133,4.075) v2@13.65,4.075 ; 47.836,10.025 cw(c47.836,9.286) v2@48.359,9.809
  Top Layer w0.6: J1.4@54.563,27.337 ccw(c54.051,27.849) 54.775,27.849 ccw(c55.499,27.849) J1.4@54.987,27.337 ; J1.4@54.775,27.125 54.775,30.6
  Top Layer w1: L1.2@54.673,13.673 cw(c52.267,13.458) v2(53.975,11.75) 55.171,12.946 L1.2@55.171,14.467
  Bottom Layer w0.3: v2@8.598,26.252 ccw(c8.051,26.799) 8.825,26.799 ; Q1.2@8.623,29.155 cw(c8.137,28.669) 8.825,28.669 ; v2(8.775,26.075) 8.825,26.125 8.825,29.357 Q1.2@8.841,29.373 10.188,28.025 19.425,28.025 v2(20.926,29.526) ; 8.825,26.558 ccw(c9.258,26.558) v2@8.952,26.252 ; 8.825,28.593 cw(c9.62,28.593) Q1.2@9.058,29.155 ; Q1.2@9.326,29.373 ccw(c10.496,29.373) 9.669,28.545 ; v2@20.676,29.526 cw(c20.072,29.526) 20.499,29.1 cw(c20.926,28.673) v2@20.926,29.276 ; v2(46.55,22.625) 47.9,22.625 U3.10@47.95,22.675 ; v2@46.727,22.448 cw(c47.154,22.021) 47.154,22.625 cw(c47.154,23.229) v2@46.727,22.802 ; 47.159,22.625 ccw(c47.159,22.916) U3.10@47.365,22.71 ; v2(49.125,30.525) 50.559,31.959 Q3.2@52.523,31.959 52.523,31.528 v2(53.375,30.675) ; v2@49.125,30.775 ccw(c49.125,31.379) 49.552,30.952 ccw(c49.979,30.525) v2@49.375,30.525 ; 50.05,10.117 50.05,2.525 v2(50.45,2.125) ; v2@51.173,35.552 ccw(c50.746,35.979) 51.35,35.979 ccw(c51.954,35.979) v2@51.527,35.552 ; v2(51.35,35.375) 51.35,37.462 Q2.2@52.497,38.609 ; 51.67,37.781 cw(c52.497,36.954) Q2.2@52.497,38.124 ; Q3.2@52.305,31.742 ccw(c51.781,31.218) 51.781,31.959 ccw(c51.781,32.701) Q3.2@52.305,32.177 ; Q3.2@52.53,31.782 ccw(c53.161,31.782) Q3.2@52.714,31.336 ; Q3.2@52.83,31.782 ccw(c54.185,31.782) v2@53.227,30.823 ; 52.961,31.284 ccw(c53.644,31.679) v2@53.44,30.916 ; 53.092,31.057 cw(c52.73,30.848) v2@53.134,30.74 ; v2@53.125,30.675 ccw(c52.521,30.675) 52.948,31.102 ccw(c53.375,31.529) v2@53.375,30.925
  Bottom Layer w0.4: v2@13.309,4.216 ccw(c12.99,4.535) 13.441,4.535 ; 13.441,4.577 cw(c14.062,4.577) Q24.2@13.622,5.016 ; 13.441,4.581 ccw(c13.956,4.581) v2@13.591,4.216 ; v2(13.45,4.075) 13.441,4.084 13.441,4.473 Q24.2@14.166,5.198 ; v2(48.5,9.95) 49.883,9.95 50.05,10.117 C5.1@51.881,11.948 ; v2@48.641,9.809 cw(c48.983,9.467) 48.983,9.95 cw(c48.983,10.433) v2@48.641,10.091 ; 50.271,10.338 ccw(c48.661,11.948) C5.1@50.938,11.948 ; 50.731,10.798 cw(c51.691,9.839) C5.1@51.691,11.195 ; C5.1@50.954,11.021 ccw(c50.027,11.948) C5.1@51.338,11.948
  Bottom Layer w0.6: C5.1@51.42,12.409 ccw(c50.306,13.523) 51.881,13.523 ccw(c53.456,13.523) C5.1@52.342,12.409 ; C5.1@51.881,11.948 51.881,15.006 56.4,19.525 56.4,25.5 J1.4@54.775,27.125 ; J1.4@55.225,27.125 ccw(c56.311,27.125) 55.543,26.357
  Bottom Layer w1: C5.1@51.881,11.948 52.079,11.75 v2(53.975,11.75) ; C5.1@52.391,12.268 ccw(c53.642,13.518) v2@53.642,11.75
VDD_+5V_R: D17.1 D18.1 D19.1 D20.1 D21.1 D22.1 D23.1 D24.1 D25.1 D26.1 D27.1 D28.1 P2.1 R57.1 | length 197.1
  Top Layer w0.3: 68.655,31.57 68.655,31.555 D19.1@70.525,31.555 ; 68.655,47.48 D17.1@70.575,47.48 ; 68.745,23.58 D20.1@70.525,23.58 ; 68.805,39.53 D18.1@70.575,39.53 ; D25.1@69.9,55.63 cw(c68.451,55.63) 69.476,54.606 cw(c70.5,53.581) D25.1@70.5,55.03 ; D25.1@70.076,55.206 cw(c68.75,53.88) 70.625,53.88 ; D20.1@70.101,23.156 ccw(c69.076,22.131) 69.076,23.58 ccw(c69.076,25.029) D20.1@70.101,24.004 ; D19.1@70.101,31.131 ccw(c69.076,30.106) 69.076,31.555 ccw(c69.076,33.004) D19.1@70.101,31.979 ; D18.1@70.151,39.106 ccw(c69.126,38.081) 69.126,39.53 ccw(c69.126,40.979) D18.1@70.151,39.954 ; D17.1@70.151,47.056 ccw(c69.126,46.031) 69.126,47.48 ccw(c69.126,48.929) D17.1@70.151,47.904 ; D25.1@70.288,55.418 cw(c69.474,54.604) 70.625,54.604 ; D21.1@70.5,15.58 68.65,17.43 68.65,53.78 D25.1@70.5,55.63 70.625,55.505 70.625,52.582 74.025,49.182 74.025,33.425 74.914,32.536 P2.1@79.962,32.536 ; 70.625,54.483 cw(c71.647,54.483) D25.1@70.924,55.206 ; v1(71.375,3.575) 71.375,6.15 v1(72.225,7) ; P2.1@78.986,32.359 ccw(c78.559,31.932) 78.559,32.536 ccw(c78.559,33.139) P2.1@78.986,32.712 ; D28.1@94.4,54.955 cw(c94.4,53.506) 95.424,54.531 cw(c96.449,55.555) D28.1@95,55.555 ; D28.1@94.4,55.555 96.55,53.405 96.55,17.58 D27.1@94.525,15.555 ; D24.1@94.5,31.58 96.495,31.58 ; D27.1@94.525,16.155 ccw(c94.525,17.604) 95.549,16.579 ccw(c96.574,15.555) D27.1@95.125,15.555 ; D26.1@94.525,23.63 96.545,23.63 ; D23.1@94.525,39.58 96.53,39.58 ; D22.1@94.55,47.555 96.355,47.555 ; D24.1@94.924,31.156 cw(c95.949,30.131) 95.949,31.58 cw(c95.949,33.029) D24.1@94.924,32.004 ; D26.1@94.949,23.206 cw(c95.974,22.181) 95.974,23.63 cw(c95.974,25.079) D26.1@94.949,24.054 ; D23.1@94.949,39.156 cw(c95.974,38.131) 95.974,39.58 cw(c95.974,41.029) D23.1@94.949,40.004 ; D22.1@94.974,47.131 cw(c95.999,46.106) 95.999,47.555 cw(c95.999,49.004) D22.1@94.974,47.979
  Bottom Layer w0.3: D21.1@70.5,15.58 71.83,14.25 73.25,14.25 ; R57.1@71.163,2.912 ccw(c70.651,3.424) 71.375,3.424 ccw(c72.099,3.424) R57.1@71.587,2.912 ; v1@71.288,3.525 cw(c70.964,3.338) 71.326,3.241 ; R57.1@71.375,2.65 v1(71.375,3.575) ; 71.424,3.241 cw(c71.786,3.338) v1@71.462,3.525 ; v1@72.225,7.1 ccw(c72.225,7.402) 72.438,7.188 ; v1@72.237,6.987 72.8,7.55 72.8,8.519 72.969,8.688 72.969,9.544 73.25,9.825 73.25,14.25 ; D27.1@94.525,15.555 93.87,14.9 90.601,14.9 89.951,14.25 73.25,14.25
pads on no net: U2.5 U3.15 U3.22 U3.23 U3.24 U5.7 U5.8 U5.9 U5.19 U5.20 U5.23 U5.25 U5.26 U5.27 U5.28
copper on no net: | length 0

## Polygon pours and split planes (outlines as drawn)
GND_R on Bottom Layer "TOP-No Net" (solid, remove dead copper, pour order 14): 66.475,11.65 98.375,11.65 98.375,-1.95 98.475,-2.061 66.65,-2.061 66.525,-2.2
GND on Bottom Layer "TOP-No Net" (solid, remove dead copper, pour order 16): -0.025,58.625 65.425,58.625 65.575,58.775 65.575,0 0,0
GND_R on Top Layer "TOP-No Net" (solid, remove dead copper, pour order 12): 66.65,12.075 98.4,12.075 98.425,12.047 98.425,-1.95 66.625,-1.95
GND on Top Layer "TOP-No Net" (solid, remove dead copper, pour order 18): -0.125,58.6 65.375,58.6 65.375,0.025 0.025,0.025

## Keep-outs
Keep-Out Layer:
  circle w0.127: c69.539,9.908 r3
  circle w0.127: c95.523,9.883 r3
  circle w0.127: c82.518,56.873 r3
  circle w0.127: c33.02,52.501 r3.5
  circle w0.127: c46.02,5.501 r3.5
  circle w0.127: c20.02,5.501 r3.5
  lines w0.127: 64.02,0.001 49.52,0.001 16.52,0.001 ; 64.025,0 ccw(c64.025,2) 66.025,2 ; 66.02,2.001 66.02,56.501 ccw(c64.02,56.501) 64.02,58.501 57.52,58.501 ; 66.03,2.037 66.03,56.537 66.03,8.537 ; 2.02,0.001 cw(c2.02,2.001) 0.02,2.001 0.02,56.501 cw(c2.02,56.501) 2.02,58.501 ; 2.02,0.001 16.52,0.001 ; 2.02,0.001 16.52,0.001 ; 2.02,58.501 8.52,58.501 ; 2.02,58.501 8.52,58.501 ; 8.52,58.501 cw(c8.52,56.501) 10.52,56.501 ; 8.52,58.501 cw(c8.52,56.501) 10.52,56.501 ; 10.52,52.501 ccw(c13.52,52.501) 13.52,49.501 ; 10.52,52.501 ccw(c13.52,52.501) 13.52,49.501 ; 10.52,52.501 10.52,56.501 ; 10.52,52.501 10.52,56.501 ; 13.52,49.501 16.52,49.501 ; 13.52,49.501 16.52,49.501 ; 16.52,49.501 24.02,49.501 ccw(c24.02,52.501) 27.02,52.501 27.02,53.501 cw(c30.02,53.501) 30.02,56.501 36.02,56.501 cw(c36.02,53.501) 39.02,53.501 39.02,52.501 ccw(c42.02,52.501) 42.02,49.501 49.52,49.501 52.52,49.501 ; 52.52,49.501 ccw(c52.52,52.501) 55.52,52.501 ; 52.52,49.501 ccw(c52.52,52.501) 55.52,52.501 ; 52.52,49.501 ccw(c52.52,52.501) 55.52,52.501 ; 55.52,52.501 55.52,56.501 ; 55.52,52.501 55.52,56.501 ; 55.52,52.501 55.52,56.501 ; 55.52,56.501 cw(c57.52,56.501) 57.52,58.501 ; 55.52,56.501 cw(c57.52,56.501) 57.52,58.501 ; 55.52,56.501 cw(c57.52,56.501) 57.52,58.501 ; 66.03,2.868 ccw(c71.03,2.868) 71.03,-2.132 94.03,-2.132 ccw(c94.03,2.868) 99.03,2.868 99.03,55.868 ccw(c94.03,55.868) 94.03,60.868 71.03,60.868 ccw(c71.03,55.868) 66.03,55.868 ; 66.03,2.868 66.03,55.868 ; 66.03,2.868 66.03,55.868

## Other copper
Top Layer:
  pour cut-out: 60.05,6 62.425,6 62.45,5.975 62.775,5.975 62.775,3.625 60.115,3.625 60.065,3.575
  pour cut-out: 33.296,11.072 35.096,11.072 35.096,9.372 35.121,9.347 33.371,9.347 33.321,9.297
  pour cut-out: 78.6,1.15 79.625,1.15 79.65,1.175 79.65,-0.45 79.675,-0.475 78.625,-0.475 78.6,-0.45
Bottom Layer:
  pour cut-out: 33.1,11.05 34.9,11.05 34.9,9.35 34.925,9.325 33.175,9.325 33.125,9.275

## Silkscreen, mask and mechanical layers (free items; w line width, h text height)
Top Overlay:
  drawing of 4677 lines, arcs and shapes, not listed
  text "X-DO10" at 3.075,55.95 h1.5
  text "_DO_V1.0" at 2.1,54.375 h1.5
  text "20160708" at 2.2,52.075 h1.5
  text "X-DO10_RFID_V1.0" at 76.25,46.5 h1.5
  text "20160708" at 79.15,44.25 h1.5
  text "此处开V沟" at 62.7,-9.475 h1.52
Bottom Overlay:
  lines w0.2: 26.05,8.55 29.775,8.55 29.775,0.55 26.075,0.55 26.075,8.45 ; 26.275,25.35 26.275,19.15 26.325,19.2 29.975,19.2 ; 26.275,29.775 29.975,29.775 29.975,25.2 29.95,25.175 26.3,25.175 26.3,29.75 ; 26.425,25.2 26.45,25.175 29.975,25.175 29.975,19.2 ; 28.15,8.575 28.15,9.2 ; 29.975,19.2 26.225,19.2 26.325,19.1 26.325,9.2 29.975,9.2 29.975,19.2
Mechanical 1:
  circle w0.127: c46.02,5.501 r1.75
  circle w0.127: c20.02,5.501 r1.75
  circle w0.127: c33.02,52.501 r1.75
  circle w0.127: c82.555,56.957 r1.75
  circle w0.127: c95.549,9.883 r1.75
  circle w0.127: c69.576,9.865 r1.75
  lines w0.127: -338.679,44.208 -338.679,254.208 ; -41.679,254.208 -338.679,254.208 ; 64.02,0.001 49.52,0.001 16.52,0.001 ; 64.025,0 ccw(c64.025,2) 66.025,2 ; 66.02,2.001 66.02,56.501 ccw(c64.02,56.501) 64.02,58.501 57.52,58.501 ; 66.03,2.037 66.03,56.537 ; -338.679,254.208 -338.679,-300.537 190.493,-300.537 190.493,254.208 -338.679,254.208 ; 2.02,0.001 cw(c2.02,2.001) 0.02,2.001 0.02,56.501 cw(c2.02,56.501) 2.02,58.501 ; 2.02,0.001 16.52,0.001 ; 2.02,0.001 16.52,0.001 ; 2.02,58.501 8.52,58.501 ; 2.02,58.501 8.52,58.501 ; 8.52,58.501 cw(c8.52,56.501) 10.52,56.501 ; 8.52,58.501 cw(c8.52,56.501) 10.52,56.501 ; 10.52,52.501 ccw(c13.52,52.501) 13.52,49.501 ; 10.52,52.501 ccw(c13.52,52.501) 13.52,49.501 ; 10.52,52.501 10.52,56.501 ; 10.52,52.501 10.52,56.501 ; 13.52,49.501 16.52,49.501 ; 13.52,49.501 16.52,49.501 ; 16.52,49.501 24.02,49.501 ccw(c24.02,52.501) 27.02,52.501 27.02,53.501 cw(c30.02,53.501) 30.02,56.501 36.02,56.501 cw(c36.02,53.501) 39.02,53.501 39.02,52.501 ccw(c42.02,52.501) 42.02,49.501 49.52,49.501 52.52,49.501 ; 52.52,49.501 ccw(c52.52,52.501) 55.52,52.501 ; 52.52,49.501 ccw(c52.52,52.501) 55.52,52.501 ; 52.52,49.501 ccw(c52.52,52.501) 55.52,52.501 ; 55.52,52.501 55.52,56.501 ; 55.52,52.501 55.52,56.501 ; 55.52,52.501 55.52,56.501 ; 55.52,56.501 cw(c57.52,56.501) 57.52,58.501 ; 55.52,56.501 cw(c57.52,56.501) 57.52,58.501 ; 55.52,56.501 cw(c57.52,56.501) 57.52,58.501 ; 66.03,2.868 ccw(c71.03,2.868) 71.03,-2.132 94.03,-2.132 ccw(c94.03,2.868) 99.03,2.868 99.03,55.868 ccw(c94.03,55.868) 94.03,60.868 71.03,60.868 ccw(c71.03,55.868) 66.03,55.868 66.03,2.868
Mechanical 3:
  drawing of 560 lines, arcs and shapes, not listed

## Dimensions
0.02,58.501 to -8.475,8.525 on Mechanical 3

## Text inside footprints (layer, text, board x,y; h text height)
CT1: Bottom Overlay "+" at 59.909,14.006 h1.5 r180